# Altium PCB v4_Сircuit_board.PcbDoc
Units mm, origin at the board's own origin, x right, y up, seen from the top; angles counter-clockwise.
Board outline 70 x 20 mm, 2 copper layers (Top Layer, Bottom Layer); 7 components, 9 nets, 75 pads, 37 vias.
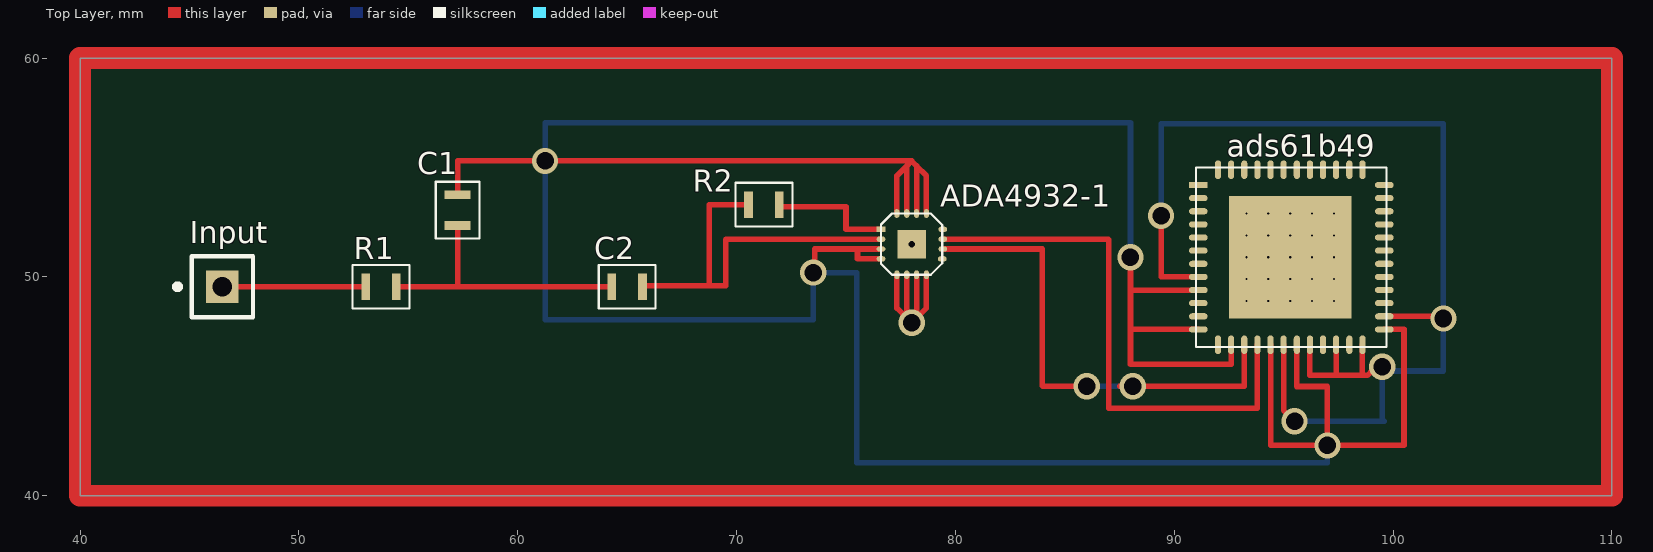
[diagram p0: Top Layer view]
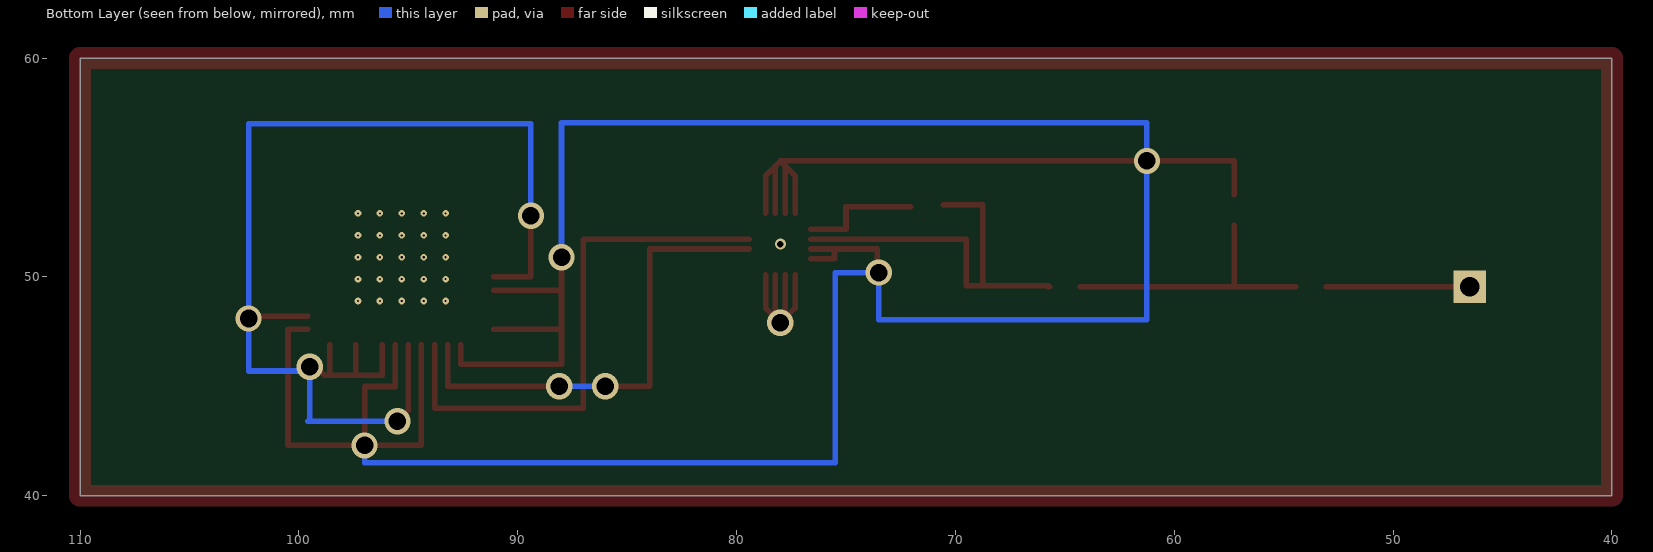
[diagram p1: Bottom Layer view, seen from below]

## Layer stack, top to bottom
Top Layer: signal copper 0.0356
Dielectric: dielectric 0.32, FR-4, Dk 4.8
Bottom Layer: signal copper 0.0356

## Board outline
40,40 110,40 110,60 40,60

## Design rules (kind name [scope] priority, off if disabled: settings)
Clearance [All] p1: gap=0.254
PolygonConnect [All] p1: connectstyle=Relief reliefconductorwidth=0.254 reliefentries=4 polygonreliefangle="90 Angle" airgapwidth=0.254
RoutingVias [All] p1: holewidth=0.711 width=1.27 viastyle="Through Hole" minholewidth=0.711 minwidth=1.27 maxholewidth=0.711 maxwidth=1.27
SilkscreenOverComponentPads [All] p1: minsilkscreentomaskgap=0.254
SolderMaskExpansion [All] p1: expansion=0.102
Width [All] p1: maxlimit=0.254 minlimit=0.254 preferedwidth=0.254
27 further rules are at their usual default settings.

## Components (designator, comment, footprint, x,y, rotation, side; value= is the part's Value field where it differs from the comment)
ADA4932-1 "ADA4932-1" ADA4932-1 78,51.5 r0 top
ads61b49 "ads61b49" ADS1b49 95.3,50.9 r0 top (schematic designator ADS?)
C1 "2pF" C_Capicator 57.25,53.05 r90 top
C2 "2pF" C_Capicator 65,49.55 r0 top
Input "Socket" PIN1 46.5,49.55 r90 top
R1 "8kOm" R_Resistor 53.75,49.55 r0 top
R2 "2.5kOm" R_Resistor 71.25,53.3 r0 top

## Footprints (in the part's own frame and the unit in brackets; to place one, negate y for a bottom-side part, rotate by r counter-clockwise, add the part's x,y. Pads: shape width x height; smd on the part's side, far side on the other; paste and mask are expansions set on the pad)
ADA4932-1 [mm]
  rect 0.4x0.24 smd mask+0.05: 1(-1.4,0.675)
  oval 0.4x0.24 smd mask+0.05: 2(-1.4,0.225) 3(-1.4,-0.225) 4(-1.4,-0.675) 9(1.4,-0.675) 10(1.425,-0.225) 11(1.425,0.225) 12(1.425,0.675)
  oval 0.24x0.4 smd mask+0.05: 5(-0.675,-1.4) 6(-0.225,-1.4) 7(0.225,-1.4) 8(0.675,-1.4) 13(0.675,1.4) 14(0.225,1.4) 15(-0.225,1.4) 16(-0.675,1.4)
  rect 1.3x1.3 smd: 17(0,0)
  silkscreen extent -1.4,-1.4 1.4,1.4, body extent -1.4,-1.4 1.4,1.4, height 1
ADS1b49 [mm] "CQFP, 48-Leads, Body 11,9x11,9mm (max), Pitch 0,50mm, IPC Medium Density"
  rect 0.85x0.28 smd: 1(-4.2,3.3)
  oval 0.85x0.28 smd: 2(-4.2,2.7) 3(-4.2,2.1) 4(-4.2,1.5) 5(-4.2,0.9) 6(-4.2,0.3) 7(-4.2,-0.3) 8(-4.2,-0.9) 9(-4.2,-1.5) 10(-4.2,-2.1) 11(-4.2,-2.7) 12(-4.2,-3.3) 25(4.3,-3.3) 26(4.3,-2.7) 27(4.3,-2.1) 28(4.3,-1.5) 29(4.3,-0.9) 30(4.3,-0.3) 31(4.3,0.3) 32(4.3,0.9) 33(4.3,1.5) 34(4.3,2.1) 35(4.3,2.7) 36(4.3,3.3)
  oval 0.28x0.85 smd: 13(-3.3,-4) 14(-2.7,-4) 15(-2.1,-4) 16(-1.5,-4) 17(-0.9,-4) 18(-0.3,-4) 19(0.3,-4) 20(0.9,-4) 21(1.5,-4) 22(2.1,-4) 23(2.7,-4) 24(3.3,-4) 37(3.3,4) 38(2.7,4) 39(2.1,4) 40(1.5,4) 41(0.9,4) 42(0.3,4) 43(-0.3,4) 44(-0.9,4) 45(-1.5,4) 46(-2.1,4) 47(-2.7,4) 48(-3.3,4)
  rect 5.6x5.6 smd mask+0.05: 49(0,0)
  silkscreen extent -4.3,-4.1 4.4,4.1, body extent -4.3,-4.1 4.4,4.1, height 1
C_Capicator [mm]
  rect 0.4x1.2 smd: 1(-0.7,0) 2(0.7,0)
  silkscreen extent -1.3,-1 1.3,1
PIN1 [mm] "Connector; Plug"
  rect 1.5x1.5 hole 0.9: 1(0,0)
  silkscreen extent -1.4,-1.4 1.4,2.17
R_Resistor [mm]
  rect 0.4x1.2 smd: 1(-0.7,0) 2(0.7,0)
  silkscreen extent -1.3,-1 1.3,1

## Part data
C1 C2: library part Сapacitor
R1: library part Resistance, "8 kOm"
R2: library part Resistance

## Via types
v1: diameter 0.3, hole 0.1, Top Layer to Bottom Layer, 23 vias
v2: diameter 1.2, hole 0.8, Top Layer to Bottom Layer, 11 vias
v3: diameter 0.3, hole 0.1, Top Layer to Bottom Layer, tented top, 2 vias
v4: diameter 0.5, hole 0.3, Top Layer to Bottom Layer, 1 vias

## Nets (pads, with @x,y where several pads share a name; then routed paths per layer and width w, separated by ;. In a path a pad name is that pad's centre, name@x,y a point inside that pad or via, vN(x,y) a via of type N, cw(c..) or ccw(c..) an arc to the next point about the centre after c; other vN are vias at no path point)
+3.3V: ads61b49.8 ads61b49.18 ads61b49.20 ads61b49.22 ads61b49.24 ads61b49.26 | length 56.4
  Top Layer w0.254: v2(89.4,52.8) 89.4,50 ads61b49.8 ; ads61b49.18 95,43.9 v2(95.5,43.4) ; ads61b49.20 96.2,45.5 97.4,45.5 ; ads61b49.22 97.4,45.5 ; ads61b49.24 98.6,45.5 ; v2@99.5,45.5 99.275,45.5 99.05,45.725 98.825,45.5 98.6,45.5 ; ads61b49.26 v2@102.2,48.2 ; v2@102.3,48.5 v2@102.5,48.3 ; 97.4,45.5 98.6,45.5
  Bottom Layer w0.254: v2(89.4,52.8) 89.4,57 102.3,57 v2(102.3,48.1) 102.3,45.7 v2@99.7,45.7 ; v2(95.5,43.4) 99.6,43.4 99.5,43.5 v2(99.5,45.9)
+5V: ADA4932-1.5 ADA4932-1.6 ADA4932-1.7 ADA4932-1.8 | length 8.9
  Top Layer w0.254: ADA4932-1.5 77.325,48.575 v2@77.775,48.125 ; ADA4932-1.6 v2@77.775,48.125 ; ADA4932-1.7 v2@78.225,48.125 ; ADA4932-1.8 78.675,48.575 v2@78.225,48.125 ; v2@77.775,48.125 v2(78,47.9) v2@78.225,48.125
GND: ADA4932-1.3 ADA4932-1.4 ADA4932-1.13 ADA4932-1.14 ADA4932-1.15 ADA4932-1.16 ads61b49.9 ads61b49.12 ads61b49.14 ads61b49.17 ads61b49.19 ads61b49.25 C1.2 | length 166.3
  Top Layer w0.254: C1.2 57.25,55.3 v2(61.25,55.3) 77.775,55.3 78,55.3 ; v2@73.575,50.275 73.575,51.275 ADA4932-1.3 ; 75.525,51.192 75.525,50.825 ADA4932-1.4 ; ADA4932-1.16 77.325,54.625 77.775,55.075 ; ADA4932-1.15 77.775,55.075 ; ADA4932-1.14 78.225,55.075 ; ADA4932-1.13 78.675,54.625 78.225,55.075 ; 88,47.6 ads61b49.12 ; 88,49.4 ads61b49.9 ; v2(88,50.9) 88,46 92.6,46 ads61b49.14 ; ads61b49.17 94.4,42.3 v2(97,42.3) ; ads61b49.19 95.6,45 95.608,44.992 97,44.992 v2(97,42.3) ; ads61b49.25 100.5,47.6 100.5,42.3 v2(97,42.3) ; 77.775,55.075 78,55.3 ; 78,55.3 78.225,55.075
  Bottom Layer w0.254: v2(88,50.9) 88,57.05 61.25,57.05 v2(61.25,55.3) 61.25,48.05 73.5,48.05 v2(73.5,50.2) 75.5,50.2 75.5,41.5 97,41.5 v2(97,42.3)
NetADA4932-1_1: ADA4932-1.1 R2.2 | length 5.5
  Top Layer w0.254: R2.2@72.05,53.2 75,53.2 75,52.233 ; 75,52.175 ADA4932-1.1
NetADA4932-1_2: ADA4932-1.2 C2.2 R2.1 | length 18.5
  Top Layer w0.254: C2.2 C2.2@65.75,49.55 ; C2.2@65.75,49.6 68.75,49.6 ; R2.1 68.75,53.3 68.75,49.6 ; ADA4932-1.2 69.525,51.725 69.5,51.7 69.5,49.6 68.75,49.6
NetADA4932-1_10: ADA4932-1.10 ads61b49.15 | length 22.5
  Top Layer w0.254: ADA4932-1.10 83.975,51.275 83.975,45.025 84,45 v2(86,45) ; v2@87.508,45 93.2,45 ads61b49.15
  Bottom Layer w0.254: v2(86,45) v2(88.1,45)
NetADA4932-1_11: ADA4932-1.11 ads61b49.16 | length 25
  Top Layer w0.254: ADA4932-1.11 86.975,51.725 87,51.7 87,44 93.8,44 ads61b49.16
NetC1_1: C1.1 C2.1 R1.2 | length 15.5
  Top Layer w0.254: C1.1 57.25,49.55 R1.2 C2.1
NetInput_1: Input.1 R1.1 | length 6.5
  Top Layer w0.254: Input.1 R1.1
pads on no net: ADA4932-1.9 ADA4932-1.12 ADA4932-1.17 ads61b49.1 ads61b49.2 ads61b49.3 ads61b49.4 ads61b49.5 ads61b49.6 ads61b49.7 ads61b49.10 ads61b49.11 ads61b49.13 ads61b49.21 ads61b49.23 ads61b49.27 ads61b49.28 ads61b49.29 ads61b49.30 ads61b49.31 ads61b49.32 ads61b49.33 ads61b49.34 ads61b49.35 ads61b49.36 ads61b49.37 ads61b49.38 ads61b49.39 ads61b49.40 ads61b49.41 ads61b49.42 ads61b49.43 ads61b49.44 ads61b49.45 ads61b49.46 ads61b49.47 ads61b49.48 ads61b49.49
copper on no net: | length 360
  Top Layer w0.254: 40,40 40,60 110,60 110,40 40,40
  Top Layer w1: 40,40 110,40 110,60 40,60 40,40
  other v1: 93.3,48.9 94.3,48.9 95.3,48.9 93.3,49.9 94.3,49.9 95.3,49.9 96.3,49.9 97.3,49.9 93.3,50.9 94.3,50.9 95.3,50.9 96.3,50.9 97.3,50.9 93.3,51.9 94.3,51.9 95.3,51.9 96.3,51.9 97.3,51.9 93.3,52.9 94.3,52.9 95.3,52.9 96.3,52.9 97.3,52.9
  other v3: 96.3,48.9 97.3,48.9
  other v4: 78,51.5